# Altium PCB Arduino Uno R3_CP.PcbDoc
Units mil, origin at the board's own origin, x right, y up, seen from the top; angles counter-clockwise.
Board outline 2699.21 x 2100 mil, 2 copper layers (Top Layer, Bottom Layer); 52 components, 51 nets, 267 pads, 61 vias.
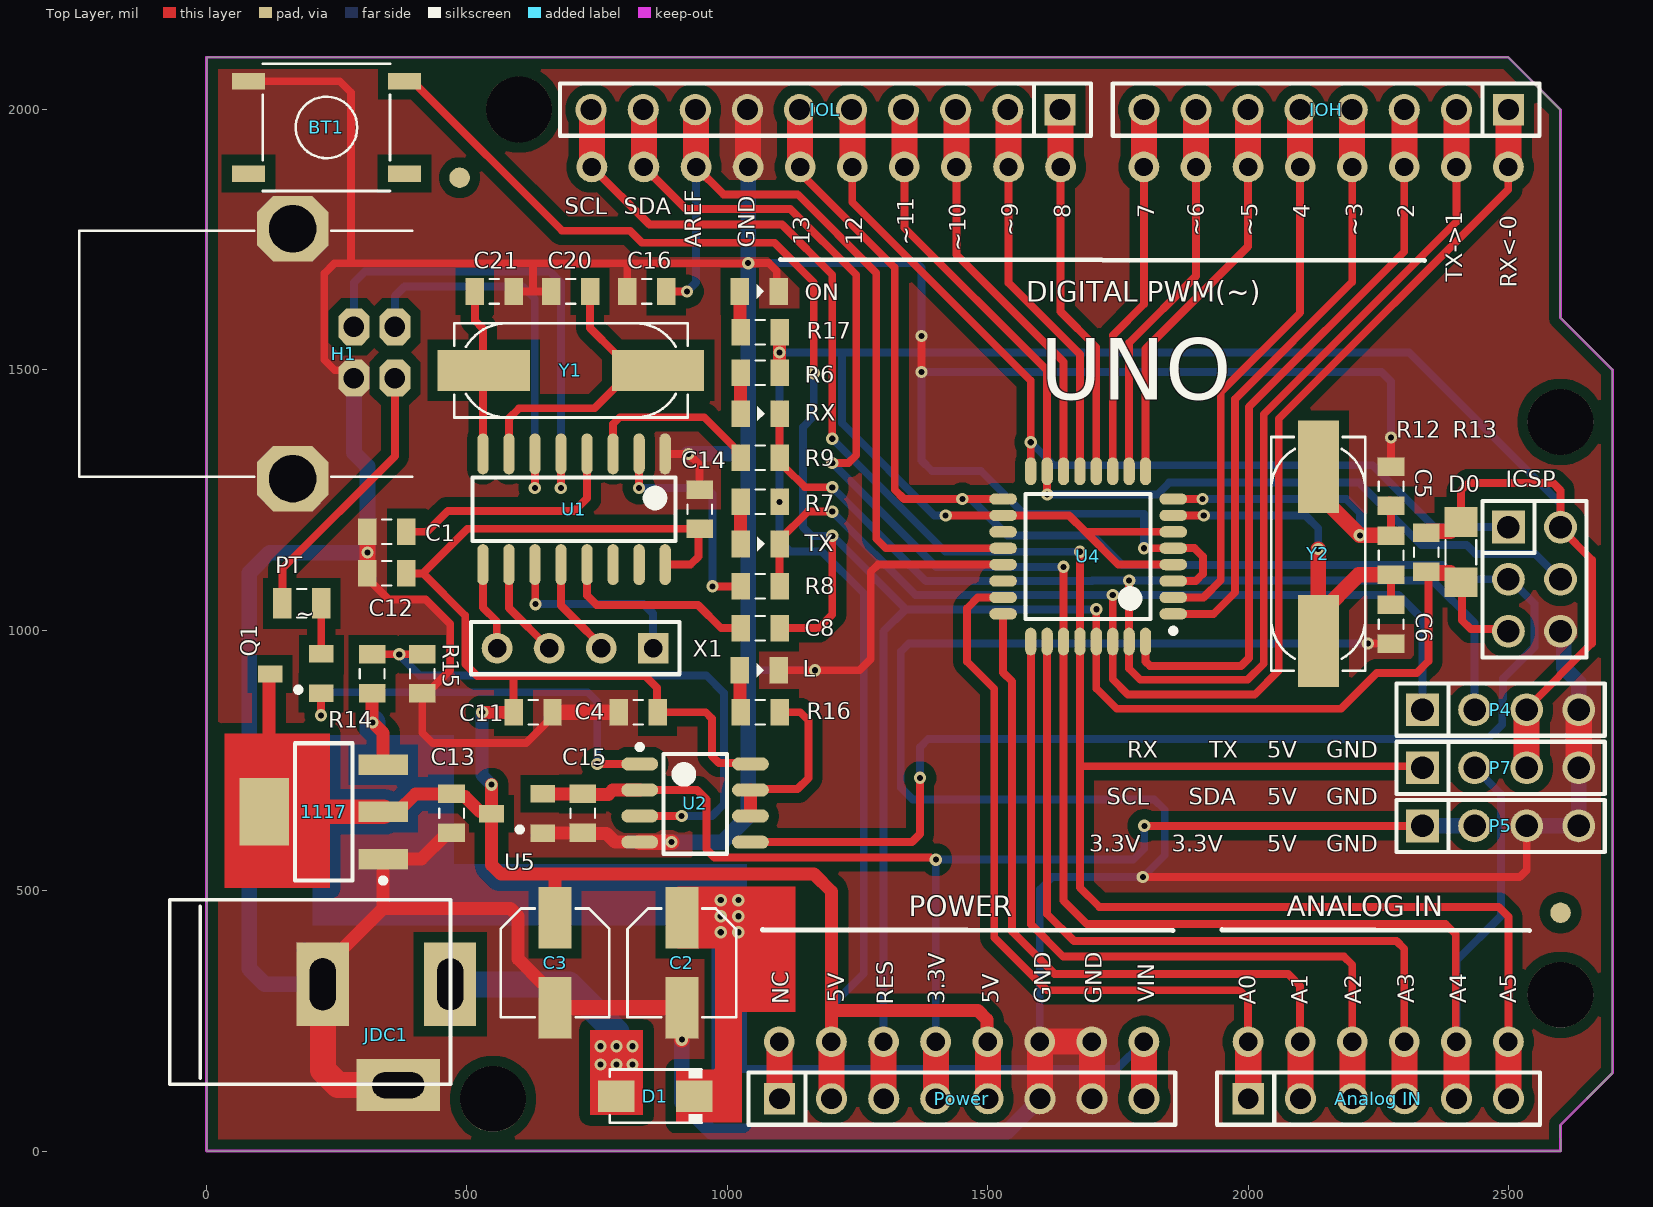
[diagram p0: Top Layer view]
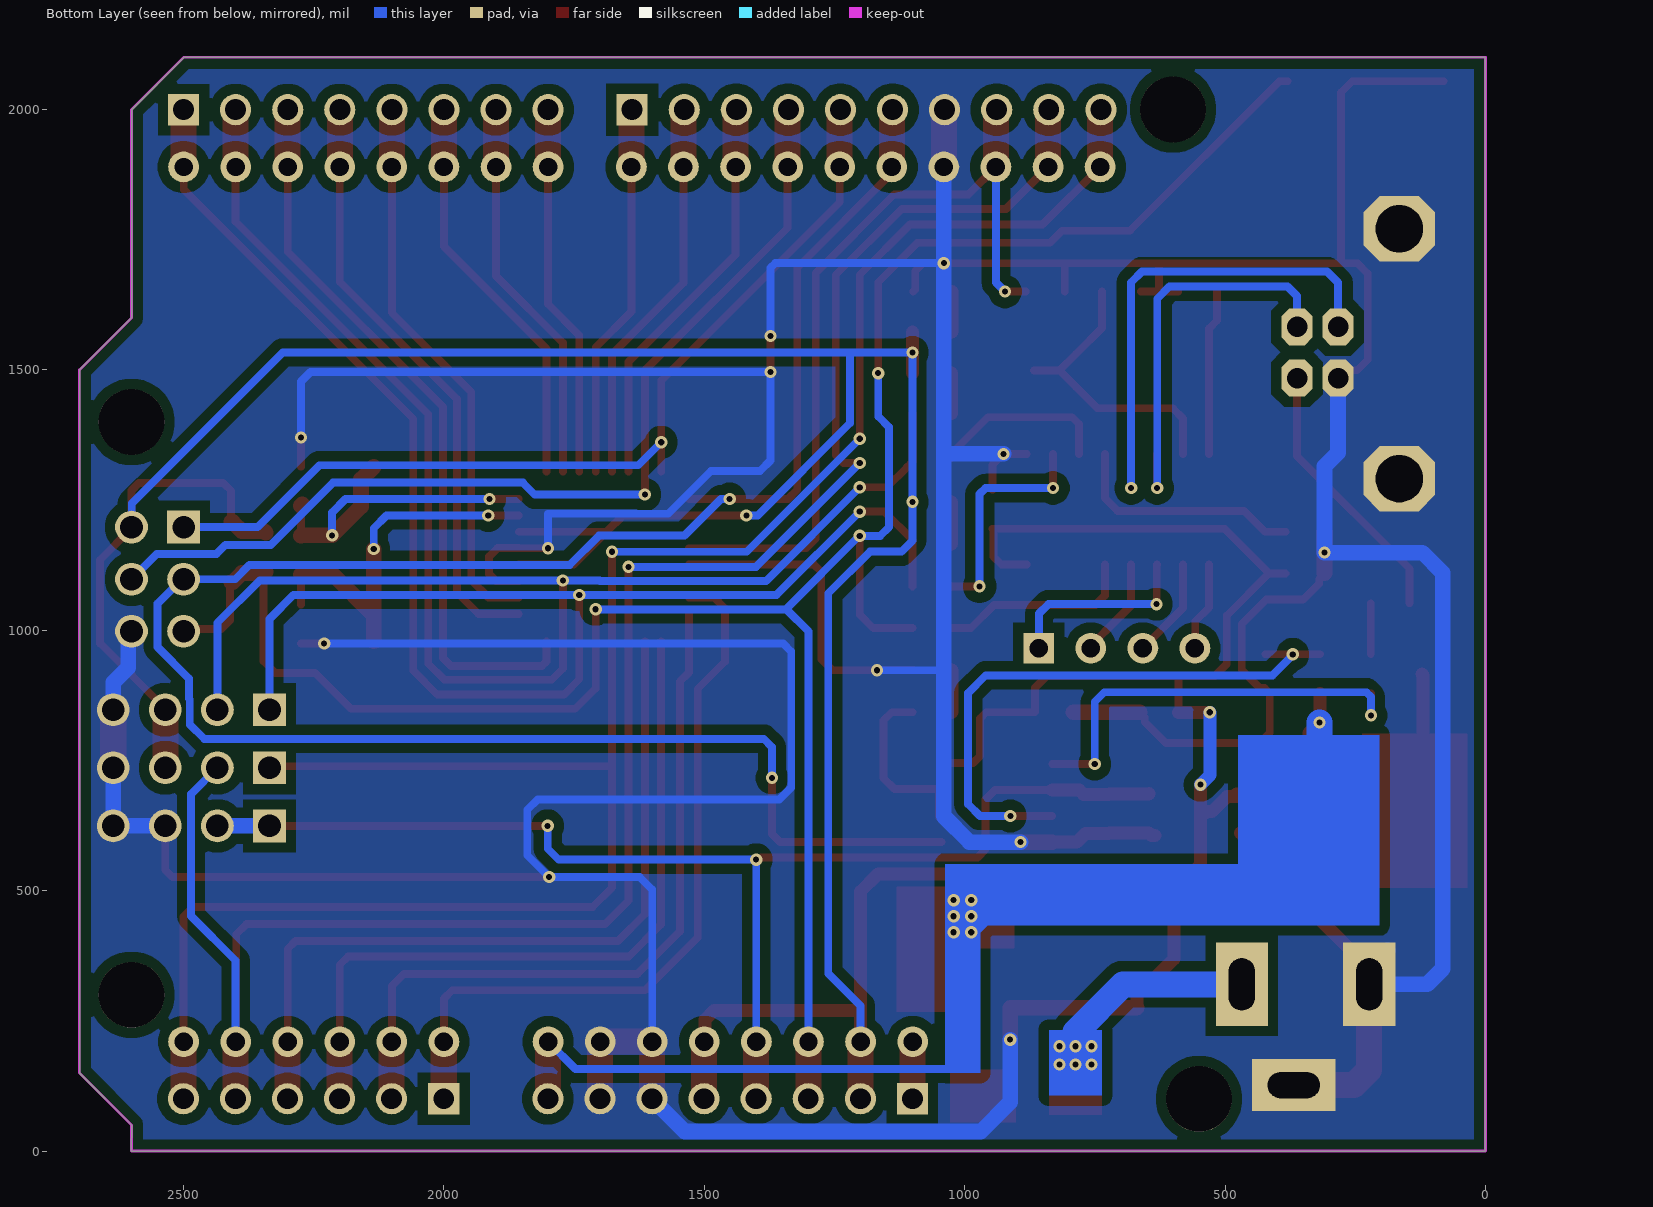
[diagram p1: Bottom Layer view, seen from below]
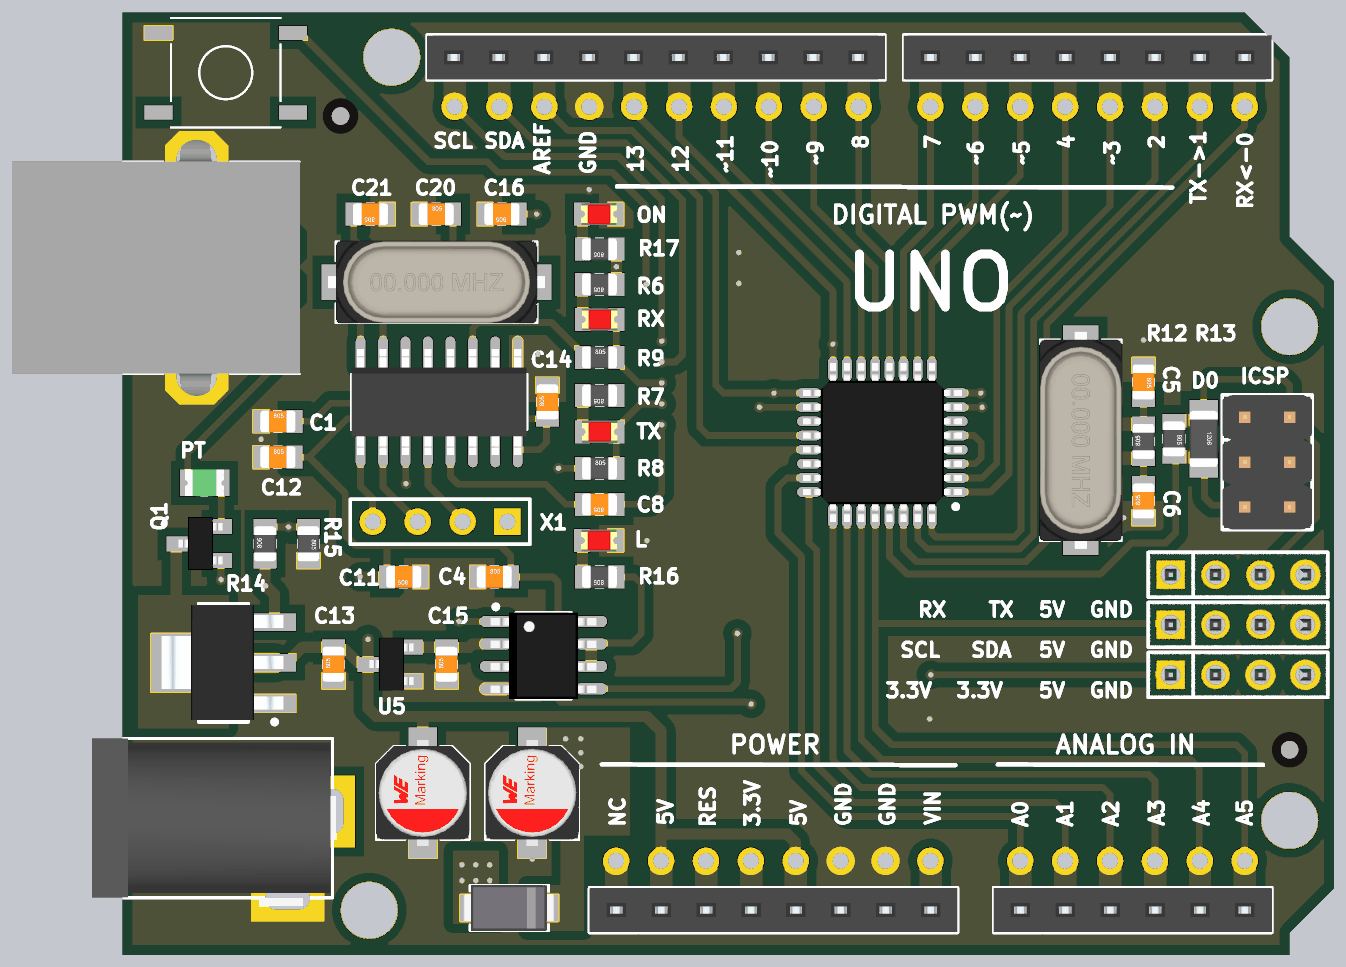
[diagram p2: 3D render of the assembled board from above, using the file's embedded part models]

## Layer stack, top to bottom
Top Solder: solder mask 0.4, Solder Resist, Dk 3.5
Top Layer: signal copper 1.4
Dielectric 1: dielectric 12.6, FR-4, Dk 4.8
Bottom Layer: signal copper 1.4
Bottom Solder: solder mask 0.4, Solder Resist, Dk 3.5

## Board outline
2599.8,49.8 2699.21,149.21 2699.21,1500.79 2599.61,1600.39 2599.61,1999.61 2500,2099.21 2500,2100 0,2100 0,0 2600,0

## Design rules (kind name [scope] priority, off if disabled: settings)
AcuteAngle [All] p1: minimum=6.00000000000000E+0001 checktracksonly=FALSE
Clearance [All] p1: gap=8 ignorepadtopadclearanceinfootprint=FALSE
HoleToHoleClearance [All] p1: gap=1 allowstackedmicrovias=TRUE
MinimumSolderMaskSliver [All] p1: minsoldermaskwidth=2
PlaneConnect [All] p1: planeconnectstyle=Direct reliefexpansion=20 reliefentries=4 reliefconductorwidth=10 reliefairgap=10
PolygonConnect [All] p1: connectstyle=Direct reliefconductorwidth=10 reliefentries=4 polygonreliefangle="90 Angle" airgapwidth=10
RoutingVias [All] p1: holewidth=50 width=25 viastyle="Through Hole" minholewidth=30 minwidth=15 maxholewidth=40 maxwidth=20
SMDToCorner [All] p1: distance=0
SilkToSolderMaskClearance [InPadClass('All Pads')] p1: minsilkscreentomaskgap=2 clearancetoexposedcopper=FALSE
SolderMaskExpansion [All] p1: expansion=2 istentingtop=FALSE
Width [All] p1: maxlimit=50 minlimit=15 preferedwidth=30
26 further rules are at their usual default settings.

## Components (designator, comment, footprint, x,y, rotation, side; value= is the part's Value field where it differs from the comment)
1117 "AMS1117" SOT223-4N 225,651.22 r180 top
"Analog IN" "Header 6" JP6-C1T 2000.39,100.39 r0 top
BT1 "Nut Nhan 2 Chan" "BT 4 PIN 6.2*6.2*3.1" 230.32,1965.55 r0 top
C1 "0.01mF" CN-SMD-0805 346.46,1188.98 r0 top
C2 "47uF" CAP-ALU-SMD-5x5.5x1.4 912.76,361.42 r270 top value=10uF/50V
C3 "47uF" CAP-ALU-SMD-5x5.5x1.4 669.29,361.42 r270 top value=10uF/50V
C4 "104" CN-SMD-0805 828.74,842.52 r0 top
C5 "22pF" CN-SMD-0805 2274.6,1276.57 r270 top
C6 "22pF" CN-SMD-0805 2274.6,1011.81 r90 top
C8 "104" CN-SMD-0805 1062.99,1004.13 r180 top
C11 "104" CN-SMD-0805 626.97,842.52 r180 top
C12 "104" CN-SMD-0805 346.46,1109.25 r0 top
C13 "100pF" CN-SMD-0805 470.47,648.23 r90 top
C14 "100pF" CN-SMD-0805 946.85,1232.28 r90 top
C15 "100pF" CN-SMD-0805 722.24,648.23 r90 top
C16 "100pF" CN-SMD-0805 845.47,1650.59 r180 top
C20 "22pF" CN-SMD-0805 699.06,1650.59 r0 top
C21 "22pF" CN-SMD-0805 552.66,1650.59 r180 top
D0 "" RES-SMD-1206 2408.7,1150 r270 top
D1 "" SMA 858.74,110 r0 top
H1 "USB-B1J" USB-B-STRANGE 361.81,1484.25 r0 top
ICSP "JP3x2" JP3-D2T 2550,1098.03 r270 top
IOH "Header 8" JP8-C1T 2500,1999.61 r180 top
IOL "Header 10" JP10-C1T 1638.58,1999.61 r180 top
JDC1 "Jac DC" DC-IN 342.91,220.12 r0 top
L "" LED-0805-Red 1062.21,923.32 r0 top
ON "" LED-0805-Red 1062.21,1650.59 r0 top
P4 "Header 4" JP4-D1T 2335,847.44 r0 top
P5 "Header 4" JP4-D1T 2335,624.37 r0 top
P7 "Header 4" JP4-D1T 2335,735.91 r0 top
Power "Header 8" JP8-C1T 1100.39,100.39 r0 top
PT "F1A" FUSE-SMD-0805 183.03,1051.69 r0 top value=Fuse
Q1 "SI2301DS" SOT23 171.22,915.79 r90 top
R6 "1K" RES-SMD-0805 1062.99,1494.23 r180 top value="R1/4W - 1K"
R7 "1K" RES-SMD-0805 1062.99,1246.56 r180 top value="R1/4W - 1K"
R8 "1K" RES-SMD-0805 1062.99,1084.29 r0 top value="R1/4W - 1K"
R9 "1K" RES-SMD-0805 1062.95,1331.38 r0 top value="R1/4W - 1K"
R12 "1M" RES-SMD-0805 2274.61,1144.19 r90 top value="R1/4W - 1K"
R13 "10K" RES-SMD-0805 2342.34,1150 r270 top value="R1/4W - 1K"
R14 "10K" RES-SMD-0805 317.91,916.34 r90 top value="R1/4W - 1K"
R15 "10K" RES-SMD-0805 414.37,916.34 r270 top value="R1/4W - 1K"
R16 "1K" RES-SMD-0805 1062.99,842.52 r180 top value="R1/4W - 1K"
R17 "1K" RES-SMD-0805 1062.99,1572.41 r180 top value="R1/4W - 1K"
RX "" LED-0805-Red 1063.78,1416.04 r0 top
TX "" LED-0805-Red 1063.78,1165.75 r0 top
U1 "CH340G" SO16 705.71,1232.28 r270 top
U2 "LM358-SOP8" SO8 938.23,668.23 r0 top
U4 "ATmega328P" TQFP32 1692.91,1141.73 r180 top
U5 "LM6206" SOT23 596.46,647.29 r90 top
X1 "Header 4" HDR1X4 857.87,965.55 r180 top
Y1 "12MHz" XTAL-RU49/4 699.8,1499.02 r180 top
Y2 "16Mhz" XTAL-RU49/4 2134.84,1146.65 r90 top

## Footprints (in the part's own frame and the unit in brackets; to place one, negate y for a bottom-side part, rotate by r counter-clockwise, add the part's x,y. Pads: shape width x height; smd on the part's side, far side on the other; paste and mask are expansions set on the pad)
"BT 4 PIN 6.2*6.2*3.1" [mm]
  rect 1.6x0.8 smd: 1(-3.8,-2.25) 2(3.8,-2.25) 3(3.8,2.25) 4(-3.8,2.25)
  silkscreen extent -3.1,-3.1 3.1,3.1
CAP-ALU-SMD-5x5.5x1.4 [mm]
  rect 3x1.6 smd: 1(-2.2,0) 2(2.2,0)
  silkscreen extent -2.65,-2.65 2.65,2.65, body extent -3,-2.65 3,2.65, height 5.45
CN-SMD-0805 [mm]
  round 0.254 on Mech15: 0(0,0)
  rect 0.9x1.3 smd: 1(-0.95,0) 2(0.95,0)
  silkscreen extent -0.23,-0.6 0.23,0.6, body extent -1,-0.62 1,0.63, height 0.8
DC-IN [mil]
  rect 100x160 hole 50 slot 100 at 90 deg: 1(125,100) 2(-119.69,100)
  rect 160x100 hole 50 slot 100 at 0 deg: 3(25.2,-93.7)
  silkscreen extent -414,-92 126,262, body extent -410,-111 134,263, height 434
FUSE-SMD-0805 [mm]
  round 0.254 on Mech15: 0(0,0)
  rect 0.9x1.5 smd: 1(-0.95,0) 2(0.95,0)
  silkscreen extent -0.23,-0.7 0.23,0.7, body extent -1.1,-0.75 1.11,0.75, height 1.24
HDR1X4 [mm] "Connector; Header; 4 Position"
  rect 1.5x1.5 hole 0.9: 1(0,0)
  round 1.5 hole 0.9: 2(2.54,0) 3(5.08,0) 4(7.62,0)
  silkscreen extent -1.27,-1.27 8.89,1.27
JP3-D2T [mm]
  rect 1.6x1.6 hole 1.1: 1(-2.54,-1.27)
  round 1.6 hole 1.1: 2(0,-1.27) 3(2.54,-1.27) 4(2.54,1.27) 5(0,1.27) 6(-2.54,1.27)
  silkscreen extent -3.81,-2.54 3.81,2.54, body extent -3.81,-2.54 3.81,2.54, height 8.55
JP4-D1T [mm]
  rect 1.6x1.6 hole 1.1: 1(0,0)
  round 1.6 hole 1.1: 2(2.54,0) 3(5.08,0) 4(7.62,0)
  silkscreen extent -1.27,-1.27 8.89,1.27, body extent -1.27,-1.27 8.89,1.27, height 8.54
JP6-C1T [mm]
  rect 1.52x1.52 hole 1.02: 1(0,0)
  round 1.52 hole 1.02: 2(2.54,0) 3(5.08,0) 4(7.62,0) 5(10.16,0) 6(12.7,0)
  silkscreen extent -1.52,-1.27 14.22,1.27, body extent -1.52,-1.25 14.22,1.25, height 8.51
JP8-C1T [mm]
  rect 1.52x1.52 hole 1.02: 1(0,0)
  round 1.52 hole 1.02: 2(2.54,0) 3(5.08,0) 4(7.62,0) 5(10.16,0) 6(12.7,0) 7(15.24,0) 8(17.78,0)
  silkscreen extent -1.52,-1.27 19.3,1.27, body extent -1.52,-1.25 19.3,1.25, height 8.51
JP10-C1T [mm]
  rect 1.52x1.52 hole 1.02: 1(0,0)
  round 1.52 hole 1.02: 2(2.54,0) 3(5.08,0) 4(7.62,0) 5(10.16,0) 6(12.7,0) 7(15.24,0) 8(17.78,0) 9(20.32,0) 10(22.86,0)
  silkscreen extent -1.52,-1.27 24.38,1.27, body extent -1.52,-1.25 24.38,1.25, height 8.51
LED-0805-Red [mm]
  round 0.254 on Mech15: 0(0,0)
  rect 0.9x1.3 smd: 1(-0.97,0) 2(0.93,0)
  silkscreen extent -0.15,-0.35 0.2,0.35, body extent -1.02,-0.63 1,0.62, height 1.1
RES-SMD-0805 [mm]
  round 0.254 on Mech15: 0(0,0)
  rect 0.9x1.3 smd: 1(-0.95,0) 2(0.95,0)
  silkscreen extent -0.23,-0.6 0.23,0.6, body extent -1,-0.62 1,0.63, height 0.8
RES-SMD-1206 [mm]
  rect 1.45x1.6 smd: 1(-1.475,0) 2(1.475,0)
  silkscreen extent -0.6,-0.75 0.6,0.75, body extent -1.6,-0.8 1.6,0.8, height 1.02
SMA [mil]
  rect 70x60 smd: 1(-71.57,-4.72) 2(78.03,-4.72)
  silkscreen extent -85,-56 94,47, body extent -100,-56 105,46, height 95
SO8 [mm]
  oval 1.8x0.635 smd: 1(-2.7,1.905) 2(-2.7,0.635) 3(-2.7,-0.635) 4(-2.7,-1.905) 5(2.7,-1.905) 6(2.7,-0.635) 7(2.7,0.635) 8(2.7,1.905)
  silkscreen extent -2.82,-2.47 1.55,2.85, body extent -3,-2.47 3,2.42, height 1.6
SO16 [mm]
  oval 2x0.55 smd: 1(-2.7,4.445) 2(-2.7,3.175) 3(-2.7,1.905) 4(-2.7,0.635) 5(-2.7,-0.635) 6(-2.7,-1.905) 7(-2.7,-3.175) 8(-2.7,-4.445) 9(2.7,-4.445) 10(2.7,-3.175) 11(2.7,-1.905) 12(2.7,-0.635) 13(2.7,0.635) 14(2.7,1.905) 15(2.7,3.175) 16(2.7,4.445)
  silkscreen extent -1.55,-4.95 1.55,4.95, body extent -3,-4.95 3,4.95, height 1.4
SOT23 [mm]
  rect 0.85x1.2 smd: 1(-0.94,-1.245) 2(0.985,-1.25) 3(0.005,1.25)
  silkscreen extent -0.88,-0.25 -0.64,0, body extent -1.47,-1.33 1.53,1.17, height 1.06
SOT223-4N [mm]
  rect 2.4x1 smd: 1(-2.9,2.3) 2(-2.9,0) 3(-2.9,-2.3)
  rect 2.4x3.3 smd: 4(2.9,0)
  silkscreen extent -3.03,-3.35 1.4,3.47, body extent -3.39,-3.27 3.5,3.23, height 1.72
TQFP32 [mm]
  oval 1.35x0.55 smd: 1(-4.15,2.8) 2(-4.15,2) 3(-4.15,1.2) 4(-4.15,0.4) 5(-4.15,-0.4) 6(-4.15,-1.2) 7(-4.15,-2) 8(-4.15,-2.8) 17(4.15,-2.8) 18(4.15,-2) 19(4.15,-1.2) 20(4.15,-0.4) 21(4.15,0.4) 22(4.15,1.2) 23(4.15,2) 24(4.15,2.8)
  oval 0.55x1.35 smd: 9(-2.8,-4.15) 10(-2,-4.15) 11(-1.2,-4.15) 12(-0.4,-4.15) 13(0.4,-4.15) 14(1.2,-4.15) 15(2,-4.15) 16(2.8,-4.15) 25(2.8,4.15) 26(2,4.15) 27(1.2,4.15) 28(0.4,4.15) 29(-0.4,4.15) 30(-1.2,4.15) 31(-2,4.15) 32(-2.8,4.15)
  silkscreen extent -4.28,-3.05 3.05,3.75, body extent -4.5,-4.5 4.5,4.5, height 1.4
USB-B-STRANGE [mm]
  oct 1.5x1.8 hole 1: 1(0,0) 2(0,2.5) 3(-2,2.5) 4(-2,0)
  oct 3.5x3.2 hole 2.3: 5(-4.988,7.283) 6(-4.988,-4.909)
  silkscreen extent -15.39,-4.81 0.84,7.19, body extent -15.45,-6.23 0.85,8.63, height 10.98
XTAL-RU49/4 [mm]
  rect 4.5x2 smd: 1(-4.25,0) 2(4.25,0)
  silkscreen extent -5.7,-2.3 5.7,2.3, body extent -6.15,-2.35 6.15,2.35, height 4.3

## Part data
1117: "AMS"
"Analog IN": "Header, 6-Pin", LatestRevisionDate=17-Jul-2002, LatestRevisionNote="Re-released for DXP Platform.", Publisher="Altium Limited"
C1 C4 C5 C6 C8 C11 C12 C13 C14 C15 C16 C20 C21: library part "Tu 0805", "Tu 0805", Bottom=10, Right=20
C2 C3: library part CP1, "Cap P  0,1uF < 22uF , 16 - 50V", Description 1="10 => 220uF/6,3V/10V - 10uF => 100uF/16V", Description 2="0,1uF => 33uF/50V - 10uF => 22uF/63V", Description 3="0,47uF => 10uF/100V"
D0 D1: library part "Diode SS14 DO214 Schottky 1A 40V ( 1N5819 DO214)_MH", "Diode SS14 DO214 Schottky 1A 40V ( 1N5819 DO214)"
H1: library part USB, "USB conector"
ICSP: library part JP3x2_3, "WR-PHD 2.54 mm Dual Socket Header", Manufacturer="W¨¹rth Elektronik eiSos GmbH", partNo=61300621821, ComponentLink1 Description=Manufacturer, ComponentLink1URL=http://www.we-online.com, ComponentLink2 Description=Datasheet, ComponentLink2URL=http://katalog.we-online.de/em/datasheet/6130xx21821.pdf, Created by="Karrer Zheng", Created Date="29 March 2013", NoPins=06
IOH Power: "Header, 8-Pin", LatestRevisionDate=17-Jul-2002, LatestRevisionNote="Re-released for DXP Platform.", Publisher="Altium Limited"
IOL: "Header, 10-Pin", LatestRevisionDate=17-Jul-2002, LatestRevisionNote="Re-released for DXP Platform.", Publisher="Altium Limited"
JDC1: library part DCIN, "Jac DC input"
L ON RX TX: library part "LED SMD_0805_MH", "LED 3mm"
P4 P5 P7 X1: "Header, 4-Pin", LatestRevisionDate=17-Jul-2002, LatestRevisionNote="Re-released for DXP Platform.", Publisher="Altium Limited"
PT: library part Fuse, "Fuse", Designed by=VanDungEvn
Q1: library part "MOSFET P"
R6 R7 R8 R9 R12 R13 R14 R15 R16 R17: library part "Tro 0805", "Tro 0805"
U1: "High and Low Side Driver", ComponentLink1Description="Manufacturer Link", ComponentLink1URL=http://www.irf.com/, ComponentLink2Description=Datasheet, ComponentLink2URL=http://www.irf.com/product-info/datasheets/data/ir2110.pdf, DatasheetVersion=PD60147J, LatestRevisionDate=04-Mar-2005, LatestRevisionNote="Stylized 3D Model Added.", Note="Pins 4, 8 and 14 are not connected", PackageDescription="DIP; 14 Leads; Row Spacing 7.62 mm; Pitch 2.54 mm", PackageReference=PDIP14, Published=8-Jun-2000, Publisher="Altium Limited"
U2: "Dual Low-Power Operational Amplifier", Code_IPC=SOIC127P600-8, Code_JEDEC=MS-012-AA, ComponentLink1Description="Manufacturer Link", ComponentLink1URL=http://www.st.com/, ComponentLink2Description=Datasheet, ComponentLink2URL=http://www.st.com/stonline/products/literature/ds/2163/lm358.pdf, LatestRevisionDate=13-Apr-2006, LatestRevisionNote="IPC-7351 Footprint Added.", PackageDescription="8-Pin Small Outline Integrated Circuit 1.27 mm Pitch", PackageReference=SO8, PackageVersion=Dec-2002, Published=24-Aug-2001, Publisher="Altium Limited"
U4: library part ATmega8-16AC, "8-Bit AVR Microcontroller with 8K Bytes of In-System Programmable Flash Memory", Code_JEDEC=MS-026-ABA, ComponentLink1Description="Manufacturer Link", ComponentLink1URL=http://www.atmel.com, ComponentLink2Description=Datasheet, ComponentLink2URL=http://www.atmel.com/dyn/resources/prod_documents/doc2486.pdf, DatasheetVersion=2486H-AVR-09/02, LatestRevisionDate=13-Apr-2006, LatestRevisionNote="IPC-7351 Footprint Added.", PackageDescription="32-Pin Thin Quad Flat Pack 0.8 mm Pitch", PackageReference=32A, PackageVersion="revB, Oct-2001", Published=17-Sep-2003, Publisher="Altium Limited"
U5: library part xc6206
Y1: library part "CRYSTAL 12MHz"
Y2: library part Crystal, "Crystal Oscillator", LatestRevisionDate=17-Jul-2002, LatestRevisionNote="Re-released for DXP Platform.", PackageReference=R38, Published=8-Jun-2000, Publisher="Altium Limited"
BT1: LatestRevisionDate=17-Jul-2002, LatestRevisionNote="Re-released for DXP Platform.", PackageReference=SPST-2, Published=24-Mar-1999, Publisher="Altium Limited"

## Free pads (board coordinates)
  round 39.37 smd mask+19.68: 0(486,1869) 0(2600,457.48)
  round 125.98 hole 125.98: 0(550,100) 0(600,2000) 0(2600,300) 0(2600,1400)
  round 59.06 hole 35.43: 2(740,1889.61) 2(840,1889.61) 2(940,1889.61) 2(1040,1889.61) 2(1100,210) 2(1140,1889.61) 2(1200,210) 2(1240,1889.61) 2(1300,210) 2(1340,1889.61) 2(1400,210) 2(1440,1889.61) 2(1500,210) 2(1540,1889.61) 2(1600,210) 2(1640,1889.61) 2(1700,210) 2(1800,210) 2(1800,1889.61) 2(1900,1889.61) 2(2000,210) 2(2000,1889.61) 2(2100,210) 2(2100,1889.61) 2(2200,210) 2(2200,1889.61) 2(2300,210) 2(2300,1889.61) 2(2400,210) 2(2400,1889.61) 2(2500,210) 2(2500,1889.61)

## Via types
v1: diameter 23.62, hole 11.81, Top Layer to Bottom Layer, tented both sides, 61 vias

## Nets (pads, with @x,y where several pads share a name; then routed paths per layer and width w, separated by ;. In a path a pad name is that pad's centre, name@x,y a point inside that pad or via, vN(x,y) a via of type N, cw(c..) or ccw(c..) an arc to the next point about the centre after c; other vN are vias at no path point)
+3.3: C15.2 P5.1 P5.2 pad.2@1400,210 Power.4 U2.2 U5.2 | length 2416.8
  Top Layer w15: U2.2 941.77,693.23 960,675 960,579.37 975.59,563.78 1390.12,563.78 1392.75,561.15 1398.85,561.15 v1(1400.5,559.5) ; v1(1800.83,624.37) P5.1
  Top Layer w25: U5.2 645.9,685.86 722.01,685.86 C15.2 722.83,685.04 771.65,685.04 779.84,693.23 U2.2
  Top Layer w50: Power.4 pad.2@1400.39,210.39
  Bottom Layer w15: pad.2@1400,210 1400.25,210.25 1400.25,559.25 v1(1400.5,559.5) 1779.65,559.5 1800.83,580.68 v1(1800.83,624.37)
  Bottom Layer w30: P5.1 P5.2
+5: 1117.2 1117.4 C3.1 C4.2 C11.2 C12.2 C13.2 C14.1 D0.1 ICSP.6 P4.3 P7.3 pad.2@1200,210 pad.2@1500,210 Power.2 Power.5 Q1.3 R6.1 R7.1 R13.1 R17.1 U1.16 U2.8 U4.4 U4.6 U4.18 U5.3 | length 9609.4
  Top Layer w15: C12.2 415.55,1109.25 ; C11.2 589.57,910.83 ; U1.16 929.13,1125.98 944.88,1141.73 944.88,1192.91 C14.1 501.18,1194.88 415.55,1109.25 ; U2.8 1042.61,745.14 983.99,745.14 970.47,758.66 970.47,830.51 958.46,842.52 C4.2 865.03,843.63 865.03,889.7 842.52,912.2 519.69,912.2 496.65,935.24 496.65,1028.15 415.55,1109.25 ; v1(1419.33,1220.47) U4.18 1656.26,1220.47 1687.76,1188.98 ; pad.2@1498.71,211.29 pad.2@1500,210 ; U4.4 1750.75,1125.98 1687.76,1188.98 ; U4.6 1687.76,1188.98 ; D0.1 2408.7,1267.76 2423.62,1282.68 2585.83,1282.68 2600,1268.5 ICSP.6 2600,1195.67 2660.24,1135.43 2660.24,974.8 2535,849.57 P4.3
  Top Layer w25: 1117.4@120.08,651.22 1117.4 120.08,660.47 120.08,914.06 Q1.3 ; 1117.2 366.73,651.22 401.14,685.63 C13.2 ; C13.2@478.35,685.63 C13.2 ; v1(529.5,842.52) C11.2 ; v1(547.24,703.55) U5.3 ; C3.1 669.29,530.62 ; R6.1 v1(1100.39,1533.32) R17.1 ; pad.2@1200,210 1200,270 ; pad.2@1498.71,211.29 1498.71,252.29 1481,270 1200,270 ; C13.2 475.69,680.41 496.36,680.41 525.05,651.72 536.12,651.72 540.35,647.49 U5.3 ; U5.3 547.24,549.61 565.35,531.5 669.29,531.5 1166.93,531.5 1200,498.43 1200,270
  Top Layer w30: R13.1 2345.06,1190.12 2387.79,1190.12 2405.75,1208.07 D0.1
  Top Layer w47.24: 1117.4@120.08,651.22 1117.2
  Top Layer w50: Power.2 pad.2@1200.39,210.39 ; Power.5 pad.2@1500.39,210.39 ; P7.3 P4.3
  Bottom Layer w15: v1@529.08,842.1 v1(529.5,842.52) ; pad.2@1200,210 1200,279 1262,341 1262,1071 1182,1151 1121.44,1151 1100.39,1172.05 v1(1100.39,1246.55) v1(1100.39,1533.32) 1217.47,1533.32 ; v1(1419.33,1220.47) 1397.53,1220.47 1220.47,1397.53 1220.47,1530.31 1217.47,1533.32 ; ICSP.6 2599.67,1198.36 2599.67,1243.24 2309.6,1533.32 1217.47,1533.32
  Bottom Layer w25: v1@529.08,842.1 529.08,721.72 v1(547.24,703.55)
AREF: C16.1 IOL.8 pad.2@940,1889.61 U4.20 | length 1587.6
  Top Layer w15: C16.1 v1(922.74,1650.59) ; pad.2@940,1889.61 992.61,1837 1135,1837 1285.91,1686.09 1285.91,1176.02 1304.45,1157.48 U4.20
  Top Layer w50: pad.2@940,1889.61 IOL.8@940,1999.61
  Bottom Layer w15: v1(922.74,1650.59) 940,1667.85 pad.2@940,1889.61
CTS: U1.9 X1.4 | length 171.7
  Top Layer w15: U1.9 530.71,1043.7 557.29,1017.12 557.29,966.14 X1.4
D+: H1.3 U1.5 | length 960.4
  Top Layer w15: v1@680.71,1272.95 U1.5
  Bottom Layer w15: H1.3 283.07,1667.72 304.35,1689 659.43,1689 680.43,1667.99 v1(680.43,1273.1)
D-: H1.2 U1.6 | length 774.1
  Top Layer w15: v1@630.71,1272.95 U1.6
  Bottom Layer w15: H1.2 361.81,1641.81 380,1660 607,1660 630.43,1636.57 v1(630.43,1273.1)
DC: D1.1 JDC1.1 | length 480.5
  Top Layer w30: D1.1 v1(787.17,166.19)
  Bottom Layer w50: JDC1.1 695.63,320.12 787.17,228.58 v1(787.17,166.19)
  other v1: 756.54,166.19 818.1,166.19 756.54,201.21 787.17,201.21 818.1,201.21
DCD: U1.12 X1.2 | length 192.4
  Top Layer w15: U1.12 680.71,1047.64 705.71,1022.64 757.87,970.47 X1.2
DSR: U1.10 X1.3 | length 192.4
  Top Layer w15: U1.10 580.71,1042.72 X1.3
DTR: C8.2 U1.13 | length 379.9
  Top Layer w15: U1.13 730.71,1066.93 749.02,1048.62 943.9,1048.62 988.39,1004.13 C8.2
G1: Q1.1 U2.1 | length 820.7
  Top Layer w15: v1(219.88,836.61) 219.88,878.45 Q1.1 ; v1(750.28,743.23) U2.1
  Bottom Layer w15: v1(219.88,836.61) 219.88,872.21 228.67,881 732,881 750.28,862.72 v1(750.28,743.23)
GND: 1117.1 BT1.4 C1.1 C2.2 C3.2 C4.1 C5.1 C6.1 C11.1 C12.1 C13.1 C14.2 C15.1 C16.2 C20.1 C21.1 H1.4 H1.5 H1.6 ICSP.4 IOL.7 JDC1.2 JDC1.3 L.2 ON.2 P4.4 P5.3 P5.4 P7.4 pad.2@1040,1889.61 pad.2@1600,210 pad.2@1700,210 Power.6 Power.7 R15.2 U1.1 U2.4 U4.3 U4.5 U4.21 U5.1 | length 16101.4
  Top Layer w15: BT1.4 255.87,2054.13 277.17,2032.83 277.17,1705.17 276.69,1704.69 ; H1.4 268.06,1499.26 246.07,1499.26 226.04,1519.29 226.04,1684.87 245.86,1704.69 277.17,1704.69 627,1704.69 ; C12.1 319.27,1099.03 319.27,1089.73 350,1059 421,1059 468,1012 468,923.69 433.46,889.15 424.59,889.15 R15.2 414.37,803.31 434.37,783.31 613.62,783.31 654.15,823.84 654.15,832.3 C11.1 ; C21.1 627,1650.59 ; C20.1 627,1650.59 ; C16.2 808.07,1704.69 ; U1.1 v1(925.59,1338.58) 946.85,1317.32 C14.2 ; L.2 v1(1168.55,923.33) 1254.04,923.33 1275.59,944.88 1275.59,1112.2 1289.37,1125.98 U4.21 ; ON.2 1095.11,1654.3 1095.11,1689.89 1080.01,1705 v1(1040,1705) 1039.69,1704.69 808.07,1704.69 ; v1(1373,1496) v1(1373,1564.99) ; v1(1798,526) 2521.28,526 2535,539.72 P5.3 ; v1(1800.24,1157.48) U4.5 1856.5,1157.68 1897.01,1157.68 1913.19,1141.5 1913.19,1108.23 1899.45,1094.49 U4.3 ; v1(2230.08,974.41) C6.1 ; C5.1 v1(2274.6,1370.04) ; 627,1650.59 627,1704.69 ; 627,1704.69 808.07,1704.69
  Top Layer w25: JDC1.2 223.23,350.12 339.17,466.06 ; C13.1 465.26,605.61 457.38,605.61 412.44,560.67 1117.1 339.17,466.06 ; U5.1@634.33,606.06 U5.1@641.22,606.06 ; U5.1@645.73,610.56 721.98,610.56 C15.1 722.97,610.1 767.85,610.1 784.72,593.23 U2.4 ; C3.2 669.29,302.36 650.3,321.36 645.77,321.36 598.18,368.95 598.18,451.42 583.53,466.06 339.17,466.06
  Top Layer w30: C12.1 v1(309.06,1149.11) C1.1 ; C11.1 C4.1 ; C3.2 C2.2 v1(912.76,213.9) ; U2.4 v1(892.83,593.23)
  Top Layer w50: JDC1.2 223.23,155.71 252.52,126.42 JDC1.3 ; pad.2@1040,1889.61 IOL.7@1040,1999.61 ; pad.2@1600,210 pad.2@1600.39,210 ; Power.6 pad.2@1600.39,210 ; pad.2@1700,210 pad.2@1600.39,210 ; Power.7 pad.2@1700.39,210.39 ; P7.4 P4.4
  Bottom Layer w15: v1(1040,1705) 1363.9,1705 1373,1695.9 v1(1373,1564.99) ; 1040.24,925 1041.91,923.33 v1(1168.55,923.33) ; pad.2@1600,210 1600,502 1624,526 v1(1798,526) 1840,568 1840,655 1820,675 1356,675 1333,698 1333,958.98 1348.43,974.41 v1(2230.08,974.41) ; v1(1800.24,1157.48) 1800.24,1223.61 1569.39,1223.61 1487,1306 1392.82,1306 1373,1325.82 v1(1373,1496) 2256.36,1496 2274.6,1477.76 v1(2274.6,1370.04)
  Bottom Layer w30: JDC1.2@188.23,385.12 223.23,350.12 JDC1.2 111.88,320.12 82,350 82,1110 121.11,1149.11 v1(309.06,1149.11) 309.06,1314.94 283.07,1340.93 H1.4 ; v1(892.83,593.23) 990.73,593.23 1040.24,642.74 1040.24,925 1040.24,1338.58 ; v1(912.76,213.9) 912.76,93.74 969,37.5 1537.5,37.5 Power.6 ; v1(925.59,1338.58) 1040.24,1338.58 ; pad.2@1040,1889.61 1040,1717.28 1040.24,1717.05 1040.24,1705 1040.24,1338.58 ; P5.3 P5.4 P7.4 ; ICSP.4 2606.31,991.72 2606.31,928.33 2635,899.65 P4.4
NC: pad.2@1100,210 Power.1 | length 110
  Top Layer w50: Power.1 pad.2@1100.39,210.39
NetC1_2: C1.2 U1.4 | length 458.7
  Top Layer w15: C1.2 423.43,1188.98 463.5,1229.06 706.38,1229.06 730.71,1253.39 U1.4
NetH1_1: H1.1 PT.1 | length 522.1
  Top Layer w15: PT.1 145.63,1118.15 361.81,1334.33 H1.1
NetL_1: L.1 R16.2 | length 81.5
  Top Layer w25: L.1 1024.8,922.54 1024.8,843.31 R16.2
NetON_1: ON.1 R17.2 | length 78.8
  Top Layer w25: ON.1 1024.8,1649.8 1024.8,1573.19 R17.2
NetPT_2: PT.2 Q1.2 | length 97.1
  Top Layer w15: Q1.2 PT.2
NetR6_2: R6.2 RX.1 | length 78.2
  Top Layer w25: RX.1 R6.2
NetR7_2: R7.2 TX.1 | length 80.8
  Top Layer w25: TX.1 R7.2
NetR8_1: R8.1 U1.2 | length 442.8
  Top Layer w15: v1@830.71,1272.95 U1.2 ; v1(971.46,1084.29) R8.1
  Bottom Layer w15: v1(830.43,1273.1) 959.9,1273.1 971.46,1261.54 v1(971.46,1084.29)
NetR9_1: R9.1 U1.3 | length 344.7
  Top Layer w15: U1.3 780.71,1396.22 793.62,1409.13 955.83,1409.13 1015.34,1349.63 1015.34,1341.6 R9.1
NetR14_2: R14.2 R15.1 U2.3 | length 1143.8
  Top Layer w15: R14.2 v1(370.08,953.74) R15.1 R15.1@422.25,953.74 ; U2.3 v1(912.28,643.23)
  Bottom Layer w15: v1(370.08,953.74) 370.08,952.36 409.06,913.39 959.61,913.39 993.5,879.5 993.5,666 970.73,643.23 v1(912.28,643.23)
NetR16_1: R16.1 U2.6 U2.7 | length 343.5
  Top Layer w15: U2.7 1046.44,695.14 1134.91,695.14 1155.87,716.1 1155.87,826.89 1140.24,842.52 R16.1
  Top Layer w25: U2.6 U2.7
PB0: IOL.1 pad.2@1640,1889.61 U4.12 | length 722.9
  Top Layer w15: pad.2@1640,1889.61 1640,1612 1708.66,1543.34 U4.12
  Top Layer w50: pad.2@1640,1889.61 IOL.1@1640,1999.61
PB1: IOL.2 pad.2@1540,1889.61 U4.13 | length 751.3
  Top Layer w15: pad.2@1540,1889.61 1540,1667 1677.17,1529.83 U4.13
  Top Layer w50: pad.2@1540,1889.61 IOL.2@1540,1999.61
PB2: IOL.3 pad.2@1440,1889.61 U4.14 | length 779.7
  Top Layer w15: pad.2@1440,1889.61 1440,1721 1645.67,1515.33 U4.14
  Top Layer w50: pad.2@1440,1889.61 IOL.3@1440,1999.61
PB3: ICSP.5 IOL.4 pad.2@1340,1889.61 U4.15 | length 1924.8
  Top Layer w15: pad.2@1340,1889.61 1340,1773 1614.17,1498.83 U4.15 v1(1614.17,1260.5)
  Top Layer w50: pad.2@1340,1889.61 IOL.4@1340,1999.61
  Bottom Layer w15: v1(1614.17,1260.5) 1825.5,1260.5 1848.46,1283.46 2212.99,1283.46 2332.68,1163.78 2419.69,1163.78 2437.01,1146.46 2551.57,1146.46 ICSP.5
PB4: ICSP.1 IOL.5 pad.2@1240,1889.61 U4.16 | length 1821.3
  Top Layer w15: pad.2@1240,1889.61 1240,1822 1582.68,1479.32 U4.16
  Top Layer w50: pad.2@1240,1889.61 IOL.5@1240,1999.61
  Bottom Layer w15: v1(1582.68,1361.02) 1626.77,1316.93 2238.98,1316.93 2357.87,1198.03 ICSP.1
PB5: ICSP.2 IOL.6 pad.2@1140,1889.61 U2.5 U4.17 | length 4094.8
  Top Layer w15: U2.5 1354.65,593.23 1370.08,608.66 v1(1370.08,716.54) ; pad.2@1140,1889.61 1140,1878 1321.69,1696.31 1321.69,1269.65 1339.37,1251.97 U4.17
  Top Layer w50: pad.2@1140,1889.61 IOL.6@1140,1999.61
  Bottom Layer w15: v1(1370.08,716.54) 1370.08,775.59 1385.83,791.34 2460.34,791.34 2488,819 2488,866.91 2489.76,868.67 2489.76,907.48 2550,967.72 2550,1051.18 2503.15,1098.03 ICSP.2 2400.79,1098.03 2373.23,1125.59 1758.41,1125.59 1702,1182 1538,1182 1468.03,1251.97 v1(1451.4,1251.97)
PC0: "Analog IN.1" pad.2@2000,210 U4.23 | length 1460.3
  Top Layer w15: U4.23 1481.06,1062.99 1460.47,1042.4 1460.47,939.69 1512.52,887.64 1512.52,410.16 1613.9,308.78 1984.13,308.78 2000,292.91 pad.2@2000,210
  Top Layer w50: 2000.39,100.39 pad.2@2000.39,210.39
PC1: "Analog IN.2" pad.2@2100,210 U4.24 | length 1430.5
  Top Layer w15: U4.24 1529.53,918.98 1546.69,901.81 1546.69,421.69 1628.5,339.88 2077.05,339.88 2100,316.93 pad.2@2100,210
  Top Layer w50: 2100.39,100.39 pad.2@2100.39,210.39
PC2: "Analog IN.3" pad.2@2200,210 U4.25 | length 1449.9
  Top Layer w15: U4.25 1583.11,977.91 1583.11,435.24 1645.12,373.23 2184.25,373.23 2200,357.48 pad.2@2200,210
  Top Layer w50: 2200.39,100.39 pad.2@2200.39,210.39
PC3: "Analog IN.4" pad.2@2300,210 U4.26 | length 1525.1
  Top Layer w15: U4.26 1614.17,454.88 1665.87,403.19 2285,403.19 2300,388.19 pad.2@2300,210
  Top Layer w50: 2300.39,100.39 pad.2@2300.39,210.39
PC4: "Analog IN.5" IOL.9 P7.2 pad.2@840,1889.61 pad.2@2400,210 U4.27 | length 3848.4
  Top Layer w15: pad.2@840,1889.61 920.61,1809 1121,1809 1247.64,1682.36 1247.64,1336.18 1232.51,1321.05 v1(1201.57,1321.05) ; v1(1645.67,1121.69) U4.27 1645.67,480.83 1690.83,435.67 2379.25,435.67 2398.82,416.1 2398.82,211.18 pad.2@2400,210
  Top Layer w50: pad.2@840,1889.61 IOL.9@840,1999.61 ; 2400.39,100.39 pad.2@2400.39,210.39
  Bottom Layer w15: v1(1201.57,1321.05) 1400.94,1121.69 v1(1645.67,1121.69) ; pad.2@2400,210 2400,365.67 2485.63,451.3 2485.63,685.28 P7.2
PC5: "Analog IN.6" IOL.10 P7.1 pad.2@740,1889.61 pad.2@2500,210 U4.28 | length 4037.3
  Top Layer w15: pad.2@740,1889.61 850.61,1779 1105,1779 1201.57,1682.43 v1(1201.57,1367.68) ; v1(1677.17,1150.61) U4.28 1677.17,738.82 ; P7.1 2332.09,738.82 1677.17,738.82 ; pad.2@2500,210 2500,449.72 2480.98,468.74 1714.25,468.74 1677.17,505.83 1677.17,738.82
  Top Layer w50: pad.2@740,1889.61 IOL.10@740,1999.61 ; 2500.39,100.39 pad.2@2500.39,210.39
  Bottom Layer w15: v1(1201.57,1367.68) 1418.64,1150.61 v1(1677.17,1150.61)
PD0: IOH.1 P4.1 pad.2@2500,1889.61 R8.2 TX.2 U4.30 | length 3387.5
  Top Layer w15: R8.2 1100.39,1092.17 1100.39,1173.62 1154.57,1227.8 v1(1201.57,1227.8) ; v1(1740.16,1067.87) U4.30 1740.16,905.84 1769.62,876.38 2012.6,876.38 2058.9,922.68 2058.9,1405.9 2499.51,1846.51 2499.51,1889.12 pad.2@2500,1889.61
  Top Layer w50: pad.2@2500,1889.61 IOH.1
  Bottom Layer w15: v1(1201.57,1227.8) 1201.57,1227.56 1361.26,1067.87 v1(1740.16,1067.87) 2288.82,1067.87 2335,1021.69 P4.1@2335,837.88
PD1: IOH.2 P4.2 pad.2@2400,1889.61 R9.2 RX.2 U4.31 | length 3389.1
  Top Layer w15: RX.2 R9.2 1100.36,1323.51 1110.57,1313.29 1149.43,1274.43 v1(1201.57,1274.43) ; v1(1771.65,1095.43) 1771.65,926.35 1793.16,904.84 1998.98,904.84 2029.96,935.83 2029.96,1414.57 2400,1784.61 pad.2@2400,1889.61
  Top Layer w50: pad.2@2400,1889.61 IOH.2
  Bottom Layer w15: v1(1201.57,1274.43) 1381.63,1094.38 1700.49,1094.38 1701.54,1095.43 2353.78,1095.43 2435,1014.21 P4.2
PD2: IOH.3 pad.2@2300,1889.61 U4.32 | length 1423.4
  Top Layer w15: U4.32 1803.15,940.09 1811.94,931.3 1986.46,931.3 2001.89,946.73 2001.89,1428.89 2300,1727 pad.2@2300,1889.61
  Top Layer w50: pad.2@2300,1889.61 IOH.3
PD3: IOH.4 pad.2@2200,1889.61 U4.1 | length 1155.9
  Top Layer w15: U4.1 1933.86,1031.5 1975.2,1072.83 1975.2,1444.2 2200,1669 pad.2@2200,1889.61
  Top Layer w50: pad.2@2200,1889.61 IOH.4
PD4: IOH.5 pad.2@2100,1889.61 U4.2 | length 1071.7
  Top Layer w15: U4.2 1914.57,1062.99 1947.64,1096.06 1947.64,1457.64 2100,1610 pad.2@2100,1889.61
  Top Layer w50: pad.2@2100,1889.61 IOH.5
PD5: IOH.6 pad.2@2000,1889.61 U4.9 | length 776
  Top Layer w15: U4.9 1803.15,1540.08 2000,1736.93 pad.2@2000,1889.61
  Top Layer w50: pad.2@2000,1889.61 IOH.6
PD6: IOH.7 pad.2@1900,1889.61 U4.10 | length 747.7
  Top Layer w15: U4.10 1771.65,1552.01 1900,1680.35 pad.2@1900,1889.61
  Top Layer w50: pad.2@1900,1889.61 IOH.7
PD7: IOH.8 pad.2@1800,1889.61 U4.11 | length 719.3
  Top Layer w15: U4.11 1740.16,1566.16 1800,1626 pad.2@1800,1889.61
  Top Layer w50: pad.2@1800,1889.61 IOH.8
RESET: BT1.3 C8.1 D0.2 ICSP.3 pad.2@1300,210 Power.3 R13.2 U4.29 | length 4539.1
  Top Layer w15: BT1.3 395.67,2054.13 682.76,1767.04 813.07,1767.04 836.11,1744 1090.5,1744 1166.18,1668.32 v1(1166.18,1493.78) ; C8.1 1175.35,1004.13 1201.57,1030.35 v1(1201.58,1181.19) ; v1(1708.66,1040.3) U4.29 1708.66,888.34 1747.87,849.13 2178.43,849.13 2247.13,917.83 2323.78,917.83 2346.28,940.34 2346.28,1109.88 R13.2@2346.28,1112.6 ; D0.2 2410.56,1090.07 2410.56,1019.36 2427.61,1002.31 2495.72,1002.31 ICSP.3
  Top Layer w30: R13.2 2345.06,1109.88 R13.2@2346.28,1109.88 ; R13.2@2346.28,1112.6 2349,1109.88 2387.8,1109.88 2405.75,1091.93 D0.2
  Top Layer w50: Power.3 pad.2@1300.39,210.39
  Bottom Layer w15: v1(1166.18,1493.78) 1166.18,1410.68 1145.5,1390 1145.5,1198 1162.31,1181.19 1202.27,1181.19 1343.62,1039.84 ; pad.2@1300,210 1300,997.8 1342.05,1039.84 1708.19,1039.84 v1(1708.66,1040.3)
RI: U1.11 X1.1 | length 376
  Top Layer w15: U1.11 631.3,1125.39 631.3,1050.79 v1(631.89,1050.2)
  Bottom Layer w15: v1(631.89,1050.2) 839.17,1050.2 857.28,1032.09 857.28,966.14 X1.1
VIN: 1117.3 C2.1 D1.2 pad.2@1800,210 Power.8 R14.1 | length 2725.5
  Top Layer w25: R14.1 317.91,823.82 339.17,802.56 1117.3 ; C2.1 976.22,448.03 995.75,428.5 1007.95,416.3 1007.95,173.06 959.27,124.38 959.27,122.78 941.77,105.28 D1.2
  Top Layer w50: Power.8 pad.2@1800.39,210.39
  Bottom Layer w15: 1007.95,416.3 1007.95,181.02 1031.5,157.48 1747.48,157.48 pad.2@1800,210
  Bottom Layer w50: v1(318.9,822.83) 318.9,649.6 458.5,510 914.25,510 1007.95,416.3
  other v1: 987.4,420.16 1021.26,420.16 987.4,450.79 1021.26,450.79 987.4,481.73 1021.26,481.73
XI: C20.2 U1.7 Y1.1 | length 578.1
  Top Layer w15: U1.7 580.71,1406.69 600.2,1426.18 745.08,1426.18 786.04,1467.15 Y1.1@817.91,1499.02 ; C20.2 736.47,1580.46 786.04,1530.89 Y1.1@817.91,1499.02 ; Y1.1 845.91,1499.02 Y1.1@817.91,1499.02
XO: C21.2 U1.8 Y1.2 | length 318.4
  Top Layer w15: C21.2 515.26,1594.98 530.71,1579.53 U1.8
XTAL1: C6.2 R12.1 U4.7 Y2.1 | length 735
  Top Layer w15: U4.7 v1(1915,1220.47) ; C6.2 R12.1
  Top Layer w30: Y2.1 Y2.1@2134.84,1028.54 ; v1(2134.84,1155.86) Y2.1@2134.84,1028.54 ; R12.1 2213.09,1106.79 Y2.1@2134.84,1028.54
  Bottom Layer w15: v1(1915,1220.47) 2110.24,1220.47 2134.84,1195.87 v1(2134.84,1155.86)
XTAL2: C5.2 R12.2 U4.8 Y2.2 | length 699.5
  Top Layer w15: U4.8 v1(1912.36,1251.97) ; R12.2 C5.2
  Top Layer w30: Y2.2 2159.21,1289.61 2159.21,1237.68 v1(2214.68,1182.2) 2273.99,1182.2 R12.2 ; C5.2@2271.89,1241.89 C5.2
  Bottom Layer w15: v1(1912.36,1251.97) 2188.98,1251.97 2214.68,1226.26 v1(2214.68,1182.2)
pads on no net: BT1.1 BT1.2 C1.0 C4.0 C5.0 C6.0 C8.0 C11.0 C12.0 C13.0 C14.0 C15.0 C16.0 C20.0 C21.0 L.0 ON.0 PT.0 R6.0 R7.0 R8.0 R9.0 R12.0 R13.0 R14.0 R15.0 R16.0 R17.0 RX.0 TX.0 U1.14 U1.15 U4.19 U4.22

## Polygon pours and split planes (outlines as drawn)
GND on Top Layer "TOP" (solid, remove dead copper, pour order 4): 0,2100 2500,2100 2500,2099 2600,1999 2600,1600 2699,1501 2699,149 2600,50 2600,0 0,0
GND on Bottom Layer "TOP" (solid, remove dead copper, pour order 3): 0,2100 2500,2100 2500,2099 2600,1999 2600,1600 2699,1501 2699,149 2600,50 2600,0 0,0

## Keep-outs
Keep-Out Layer:
  lines w5: 0,0 0,2100 2500,2100 2600,2000 2600,1600 2700,1500 2700,150 2600,50 2600,0 0,0

## Other copper
Top Layer:
  rectangle net VIN: 1011,267 1131,399
  rectangle net VIN: 904.29,388.58 1131,507.48
  rectangle net VIN: 901.57,54.33 1027.95,156.3
  rectangle net VIN: 976.22,75.2 1027.95,506.69
  rectangle net DC: 736.22,69.21 838.58,232.84
  rectangle net +5: 34.45,504.92 237.2,802.17
Bottom Layer:
  rectangle net VIN: 203.15,433.46 1037.4,492.13
  region net VIN: 1037.8,483.86 1037.8,551.57 470.47,551.57 470.47,483.86
  rectangle net VIN: 203.15,483.86 474.8,798.82
  rectangle net VIN: 970.08,150 1037.8,494.49
  rectangle net DC: 736.22,106.3 838.58,232.68

## Silkscreen, mask and mechanical layers (free items; w line width, h text height)
Top Overlay:
  lines w10: 1068.11,424.8 1855.51,423.3 ; 1101.97,1712.2 2338.58,1709.84 ; 1950,424.8 2540.55,423.68
  text "SCL" at 688.19,1799.21 h31.5
  text "SDA" at 801.18,1799.21 h31.5
  text "8" at 1659.82,1791.54 h31.5 r90
  text "7" at 1819.82,1791.54 h31.5 r90
  text "4" at 2118.32,1791.54 h31.5 r90
  text "2" at 2318.82,1791.54 h31.5 r90
  text "~9" at 1558.82,1756.55 h31.5 r90
  text "~6" at 1915.82,1756.55 h31.5 r90
  text "~5" at 2018.32,1756.55 h31.5 r90
  text "~3" at 2219.82,1756.55 h31.5 r90
  text "13" at 1158.32,1739.06 h31.5 r90
  text "12" at 1258.82,1739.06 h31.5 r90
  text "~11" at 1358.32,1739.06 h31.5 r90
  text "AREF" at 950.35,1734.9 h31.5 r90
  text "GND" at 1052.36,1734.89 h31.5 r90
  text "~10" at 1457.82,1727.39 h31.5 r90
  text "TX->1" at 2411.56,1669.08 h31.5 r90
  text "RX<-0" at 2516,1657.42 h31.5 r90
  text "DIGITAL PWM(~)" at 1574.41,1630.71 h39.37
  text "UNO" at 1600.79,1442.52 h118.11
  text "RX" at 1767.57,754.87 h31.5
  text "TX" at 1925.42,754.87 h31.5
  text "5V" at 2036.98,754.87 h31.5
  text "GND" at 2149.87,754.87 h31.5
  text "SCL" at 1728.22,664.87 h31.5
  text "SDA" at 1886.06,664.87 h31.5
  text "5V" at 2036.98,664.87 h31.5
  text "GND" at 2149.87,664.87 h31.5
  text "3.3V" at 1695.42,574.87 h31.5
  text "3.3V" at 1853.26,574.87 h31.5
  text "5V" at 2036.98,574.87 h31.5
  text "GND" at 2149.87,574.87 h31.5
  text "POWER" at 1348.43,450.39 h39.37
  text "ANALOG IN" at 2074.02,450.39 h39.37
  text "VIN" at 1820,286 h31.5 r90
  text "5V" at 1225,285 h31.5 r90
  text "A3" at 2319,284 h31.5 r90
  text "A4" at 2419,284 h31.5 r90
  text "A5" at 2515,284 h31.5 r90
  text "5V" at 1521,283 h31.5 r90
  text "GND" at 1621,283 h31.5 r90
  text "GND" at 1719,283 h31.5 r90
  text "NC" at 1118,282 h31.5 r90
  text "3.3V" at 1418,282 h31.5 r90
  text "A1" at 2115,282 h31.5 r90
  text "A2" at 2217,282 h31.5 r90
  text "RES" at 1319,281 h31.5 r90
  text "A0" at 2015,281 h31.5 r90

## Text inside footprints (layer, text, board x,y; h text height)
H1: Mechanical 4 "4:GND" at -174.58,1637.99 h31.5; Mechanical 4 "3:D-" at -175.58,1550.99 h31.5; Mechanical 4 "2:D+" at -172.58,1461.99 h31.5; Mechanical 4 "1:VCC" at -177.58,1366.99 h31.5; Mechanical 4 "3" at 275.42,1650.99 h31.5; Mechanical 4 "2" at 360.42,1645.99 h31.5; Mechanical 4 "4" at 268.42,1395.99 h31.5; Mechanical 4 "1" at 369.42,1388.99 h31.5
PT: Top Overlay "~" at 171.22,1016.26 h31.5